# EAGLE board Montaje - laboratorio 1 (EAGLE 7.6.0)

Size 56.82 x 53.33 mm. Coordinates in mm from the lower left corner, seen from the top.
Outline: 0,0 56.82,0 56.82,53.33 0,53.33 0,0
Copper layers (1*16): Top 0.035mm / dielectric 1.5mm / Bottom 0.035mm
Design rules "default": minimum track width 10mil, minimum drill 24mil, track to track 8mil, track to pad 8mil, pad to pad 8mil, via to via 8mil, smd to smd 8mil, copper to edge 40mil, drill to drill 8mil, minimum pad ring 10mil, minimum via ring 8mil, stop-mask expansion 4mil, vias tented up to drill 0mil, thermal gap 10mil

## Footprints (pad centres in the part's own frame; a part is rotated, then mirrored left to right if it is on the bottom)
DC-POWER = drill 0.889 pad 2.54 octagon: + 0,2.54; - 0,-2.54
LED5MM = drill 0.813 octagon: A -1.27,0; K 1.27,0
2P-2.54-65/35MIL = drill 0.889 pad 1.651 square: 1 0,1.27 | drill 0.889 pad 1.651: 2 0,-1.27
PIEZO-22MM = drill 1 pad 2.54: P$1 -5,0; P$2 5,0
0207/10 = drill 0.813 octagon: 1 -5.08,0; 2 5.08,0
DIP04YL = drill 0.813 long: 1 -3.81,-3.81; 2 -1.27,-3.81; 3 1.27,-3.81; 4 3.81,-3.81; 5 3.81,3.81; 6 1.27,3.81; 7 -1.27,3.81; 8 -3.81,3.81
TO220 = drill 1.118 long: 1 -2.54,-6.35; 2 0,-6.35; 3 2.54,-6.35 | hole 3.302: 0,11.176
DIL14 = drill 0.813 long: 1 -7.62,-3.81; 2 -5.08,-3.81; 3 -2.54,-3.81; 4 0,-3.81; 5 2.54,-3.81; 6 5.08,-3.81; 7 7.62,-3.81; 8 7.62,3.81; 9 5.08,3.81; 10 2.54,3.81; 11 0,3.81; 12 -2.54,3.81; 13 -5.08,3.81; 14 -7.62,3.81

## Placement (x,y rotation side)
BAT1  [DC-POWER]  5,10.08 0 top
D1  [LED5MM]  5,111.68 0 top  (outside the outline)
D2  [LED5MM]  5,124.38 0 top  (outside the outline)
D3  [LED5MM]  5,137.08 0 top  (outside the outline)
D7  [LED5MM]  5,238.68 0 top  (outside the outline)
M1  [2P-2.54-65/35MIL]  5,276.78 0 top  (outside the outline)
M2  [2P-2.54-65/35MIL]  5,289.48 0 top  (outside the outline)
PIEZO2  [PIEZO-22MM]  5,264.08 0 top  (outside the outline)
R2  1k‎Ω  [0207/10]  5,73.58 0 top  (outside the outline)
R3  1k‎Ω  [0207/10]  5,86.28 0 top  (outside the outline)
R4  1k‎Ω  [0207/10]  5,98.98 0 top  (outside the outline)
R5  1k‎Ω  [0207/10]  5,149.78 0 top  (outside the outline)
R7  1k‎Ω  [0207/10]  5,162.48 0 top  (outside the outline)
R8  1k‎Ω  [0207/10]  5,175.18 0 top  (outside the outline)
R9  1k‎Ω  [0207/10]  5,200.58 0 top  (outside the outline)
R10  1k‎Ω  [0207/10]  5,213.28 0 top  (outside the outline)
R11  1k‎Ω  [0207/10]  5,225.98 0 top  (outside the outline)
SW1  [DIP04YL]  5,60.88 0 top  (outside the outline)
U1  [TO220]  5,22.78 0 top
U2  [DIL14]  5,35.48 0 top
U4  [DIL14]  5,251.38 0 top  (outside the outline)
U5  [DIL14]  5,48.18 0 top
U6  [DIL14]  5,187.88 0 top  (outside the outline)

## Library data of the parts
BAT1 D1-D3 D7 M1 M2 PIEZO2 R2-R5 R7-R11 SW1 U1 U2 U4-U6 = AUTODESK_CIRCUITS_BREADBOARD

## Nets
N$1: D1.A R2.2 SW1.1 U2.1 U5.13 U6.5
N$2: D1.K R5.2
N$3: U2.3 U2.5
N$4: SW1.4
N$5: SW1.5
N$6: U5.2
N$7: U5.5
N$8: U5.6
N$9: D7.A PIEZO2.P$1 U4.3
N$10: M1.2 U4.11
N$11: U4.1 U6.3
N$12: U6.9
N$13: U6.11
N$14: U6.12
N$15: U6.8
N$16: U6.10
N$17: U6.13
N$18: D3.K R8.2
N$19: D2.K R7.2
N$20: U5.4
N$21: D2.A R3.2 SW1.2 U2.2 U5.11 U6.2
N$22: D3.A R4.2 SW1.3 U2.4 U2.9 U5.9
N$23: U5.3
N$24: U5.1
N$25: M1.1 R9.2
N$26: M2.2 U2.6
N$27: M2.1 R10.2
N$28: BAT1.+ U1.1
N$29: U5.8 U6.1
N$30: SW1.6 SW1.7 SW1.8 U1.3 U2.14 U4.14 U5.14 U6.14
N$31: BAT1.- R2.1 R3.1 R4.1 R5.1 R7.1 R8.1 R9.1 R10.1 R11.1 U1.2 U2.7 U4.7 U5.7 U6.7
N$32: U4.4
N$33: U4.5
N$34: U4.6
N$35: U4.2 U6.6
N$36: U2.8 U4.12
N$37: U2.11 U4.13
N$38: D7.K PIEZO2.P$2 R11.2
N$39: U4.9
N$40: U4.10
N$41: U4.8
N$42: U2.10 U2.13 U5.12
N$43: U2.12 U5.10 U6.4

## Tracks (layer width: path | path; a pad name or v marks a point on that pad's centre or on a via)
N$1  (5 unrouted)
N$2  (1 unrouted)
N$3  (1 unrouted)
N$9  (2 unrouted)
N$10  (1 unrouted)
N$11  (1 unrouted)
N$18  (1 unrouted)
N$19  (1 unrouted)
N$21  (5 unrouted)
N$22  (5 unrouted)
N$25  (1 unrouted)
N$26  (1 unrouted)
N$27  (1 unrouted)
N$28  (1 unrouted)
N$29  (1 unrouted)
N$30  (7 unrouted)
N$31  (14 unrouted)
N$35  (1 unrouted)
N$36  (1 unrouted)
N$37  (1 unrouted)
N$38  (2 unrouted)
N$42  (2 unrouted)
N$43  (2 unrouted)